# Altium PCB main-module-60mmPIC.PcbDoc (part 2 of 2)
Units mm, origin at the board's own origin, x right, y up, seen from the top; angles counter-clockwise.
Board outline 60 x 60 mm, 2 copper layers (Top Layer, Bottom Layer), stack 1.591 mm thick; 103 components, 103 nets, 469 pads, 239 vias.
Unrouted connection lines stored in the file: 40.
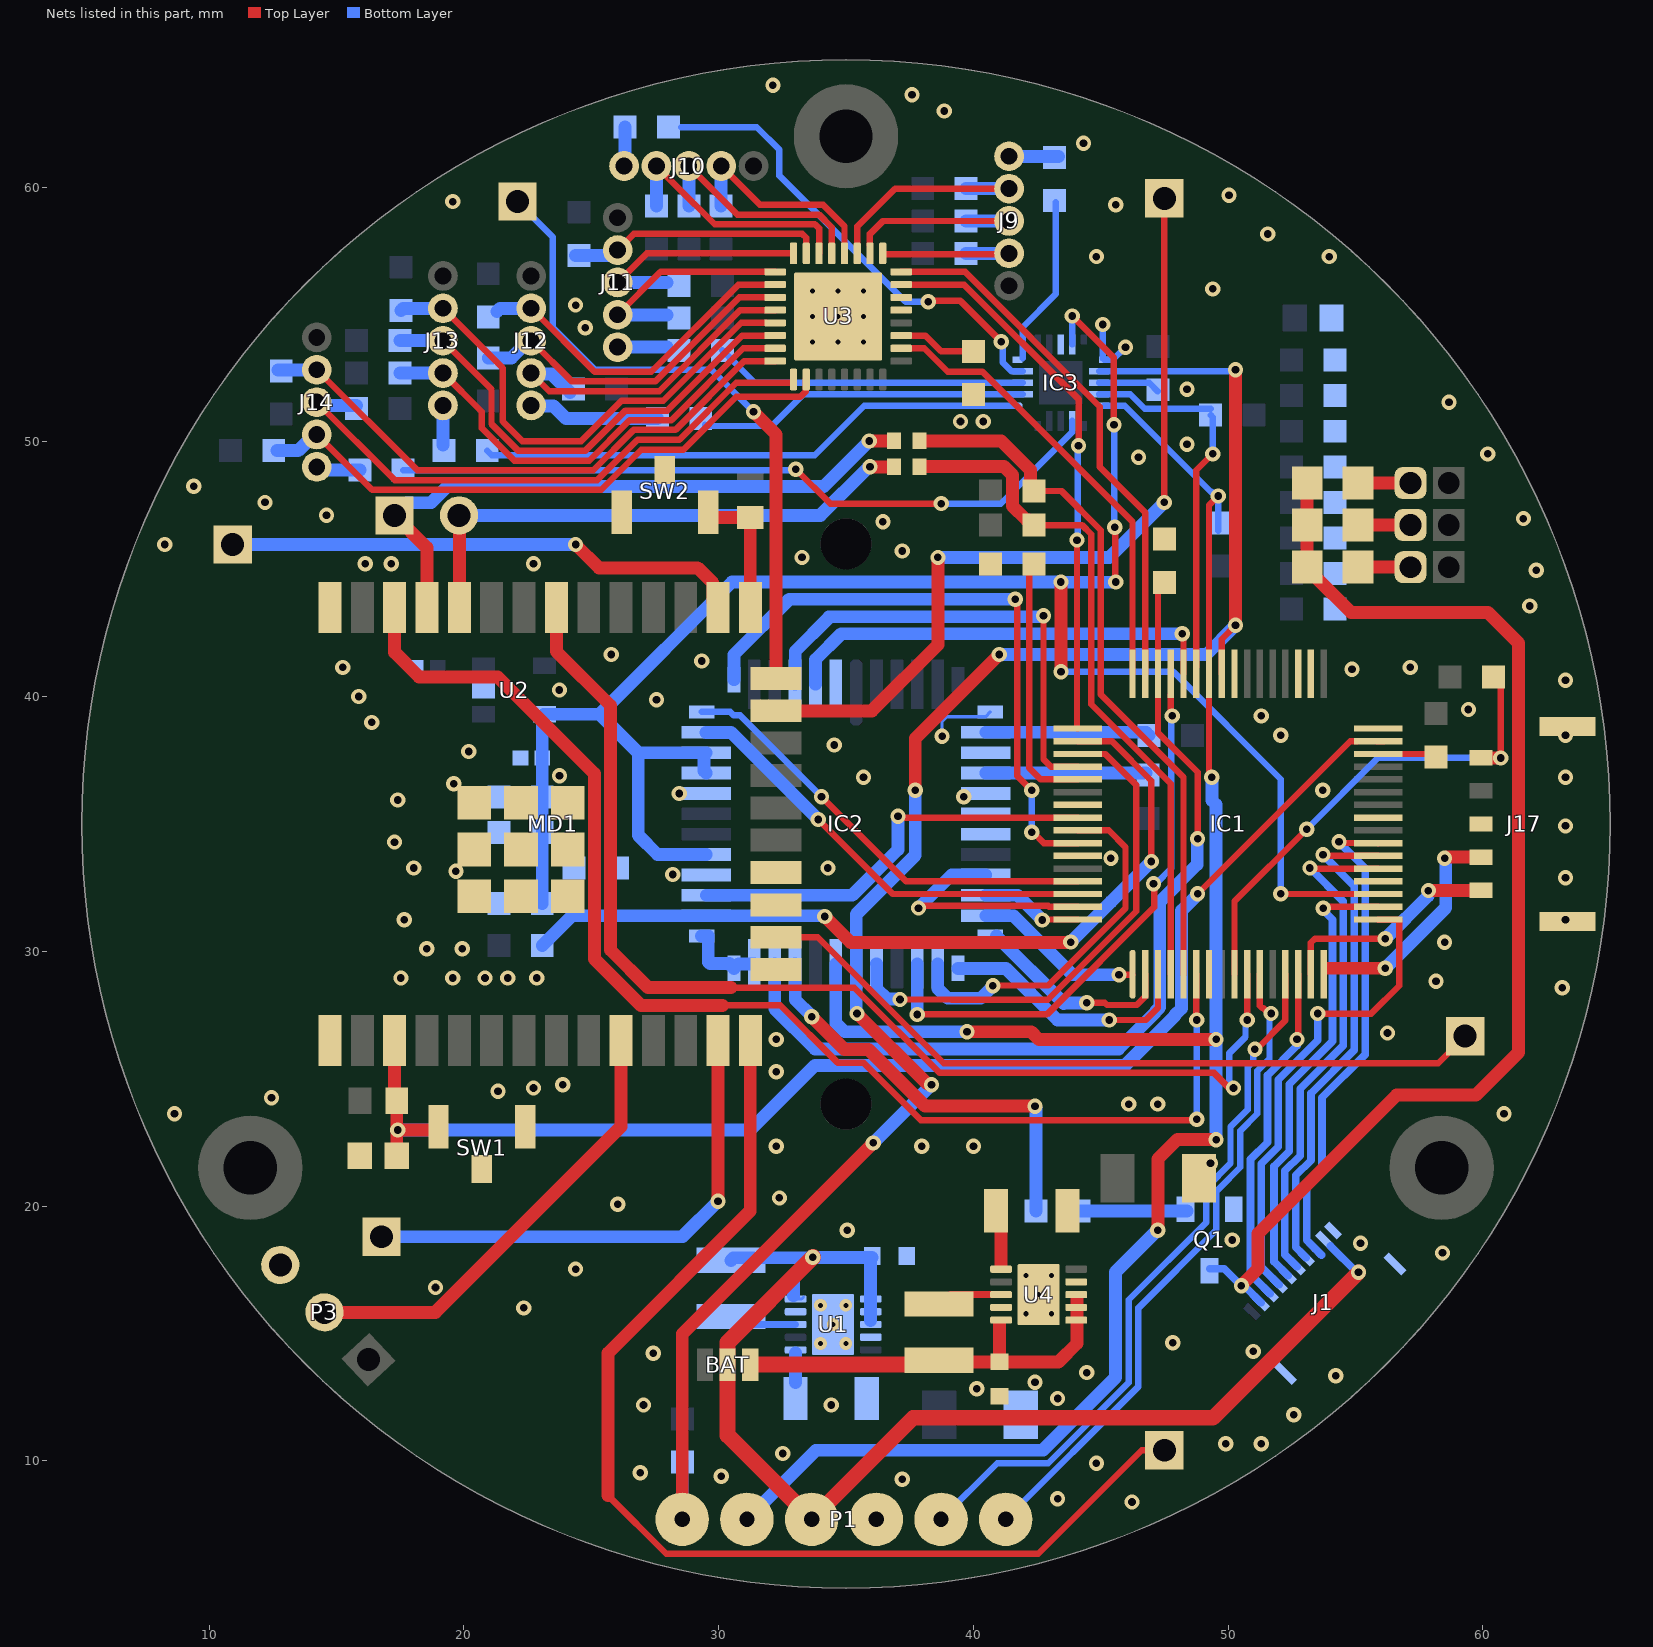
[diagram p2: the nets of this part, all layers, seen from the top]

## Via types
v1: diameter 0.6, hole 0.3, Top Layer to Bottom Layer, 220 vias
v2: diameter 0.5, hole 0.2, Top Layer to Bottom Layer, 19 vias

## Nets (pads, with @x,y where several pads share a name; then routed paths per layer and width w, separated by ;. In a path a pad name is that pad's centre, name@x,y a point inside that pad or via, vN(x,y) a via of type N, cw(c..) or ccw(c..) an arc to the next point about the centre after c; other vN are vias at no path point) (continued)
A3V3: C7.1 C14.2 C17.2 C18.2 C19.2 IC1.19 IC2.35 IC2.39 IC2.40 IC3.9 U2.5 | length 78.4
  Top Layer w0.25: v1@52.078,32.25 IC1.19@55.9,32.25
  Top Layer w0.254: v1(43.884,54.945) 45.519,53.31 v1(45.519,50.673) ; v1(45.556,46.646) 45.574,46.628 45.574,44.596 v1@45.593,44.577
  Top Layer w0.508: v1(43.438,40.976) v1@43.438,44.496
  Bottom Layer w0.25: IC3.9@43.884,53.824 v1(43.884,54.945)
  Bottom Layer w0.254: v1(43.438,40.976) 47.855,40.976 52.07,36.762 v1(52.07,32.258) ; v1(45.519,50.673) 45.538,50.655 45.538,46.664 v1(45.556,46.646)
  Bottom Layer w0.5: C17.2@23.075,31.877 23.075,33.274 C19.2@23.075,34.671 C14.2@23.075,36.068 23.075,37.592 23.075,39.238 23.146,39.309 U2.5@23.171,39.309 25.334,39.309 ; IC2.35@29.51,33.8 27.599,33.8 26.843,34.556 26.843,37.8 ; IC2.39@29.51,37 29.429,37.081 29.429,37.719 IC2.40@29.51,37.8 26.843,37.8 ; 41.963,44.496 41.959,44.5 30.525,44.5 25.334,39.309 ; 41.963,44.5 v1(43.438,44.5) ; v1@43.438,44.496 45.551,44.496 v1@45.575,44.521 ; 25.334,39.309 26.843,37.8
  other v1: 45.593,44.5
E32_RST: C1.2 IC1.31 MD1.3 R1.1 SW1.2 | length 52.3
  Top Layer w0.25: v1(48.804,32.258) 54.796,38.25 IC1.31@55.077,38.25
  Top Layer w0.254: IC1.31@55.839,38.25 IC1.31@56.121,38.25
  Top Layer w0.508: R1.1@17.28,24.13 MD1.3@17.28,26.5 ; C1.2@17.362,22.188 17.362,22.987 R1.1@17.362,24.13 ; v1(17.399,22.987) 18.794,22.987 SW1.2@18.831,22.95
  Bottom Layer w0.508: v1(17.399,22.987) 31.242,22.987 33.782,25.527 45.968,25.527 47.914,27.473 47.914,27.506 48.168,27.76 48.168,31.597 48.804,32.233 v1(48.804,32.258)
GND: C1.1 C2.1 C4.1 C5.2 C6.2 C7.2 C8.2 C9.1 C10.1 C11.1 C12.1 C13.1 C14.1 C15.1 C16.1 C17.1 C18.1 C19.1 C26.1 C40.1 C41.2 C42.2 IC1.7 IC1.20 IC1.25 IC1.34 IC1.35 IC1.40 IC1.55 IC1.59 IC2.7 IC2.9 IC2.11 IC2.12 IC2.13 IC2.29 IC2.30 IC2.31 IC2.34 IC2.38 IC2.48 IC3.8 IC3.11 J1.1 J1.MP1 J1.MP2 J17.3 J17.MP1 J17.MP2 MD1.1 MD1.15 MD1.38 MD1.39 MD1.39_1 MD1.39_2 MD1.39_3 MD1.39_4 MD1.39_5 MD1.39_6 MD1.39_7 MD1.39_8 P1.4 P3.3 Q1.2 R10.1 R16.1 R25.1 SW1.1 SW1.3 SW2.1 SW2.3 U1.4 U1.9 U1.11 U2.2 U3.29 U3.30 U3.33 U4.4 U4.9 U4.11 | length 8.6
  Top Layer w0.254: U3.33@35.421,56.122 35.609,56.122 U3.33@35.65,56.081
  Bottom Layer w0.127: v1(38.772,38.444) 38.772,39.026 38.96,39.214 40.478,39.214 IC2.7@40.665,39.4 ; IC3.11@45.085,53.273 IC3.11@45.134,53.224
  Bottom Layer w0.25: IC3.11@45.085,53.273 v1(45.085,54.61) ; IC3.11@45.134,53.224 45.477,53.224 v1(45.974,53.721)
  Bottom Layer w0.508: IC2.31@29.335,30.6 29.585,30.6 IC2.31@29.591,30.594 ; IC2.31@29.591,30.6 IC2.31@29.591,30.594 ; IC2.29@31.4,29.51 30.775,29.51 IC2.30@30.6,29.335 30.42,29.515 29.665,29.515 29.591,29.589 IC2.31@29.591,30.594
  other v1: 46.228,8.382 43.307,8.509 37.211,9.271 30.099,9.398 26.924,9.525 44.831,9.906 32.512,10.287 49.911,10.668 51.308,10.668 52.578,11.811 27.051,12.192 34.417,12.192 43.307,12.446 40.132,12.827 42.418,13.081 54.229,13.335 44.45,13.462 27.432,14.224 50.984,14.294 47.832,14.629 22.352,16.002 18.886,16.801 24.384,17.526 58.42,18.161 55.199,18.536 50.165,18.669 35.052,19.05 26.035,20.066 32.385,20.32 49.309,21.676 32.258,22.352 37.973,22.352 40.005,22.352 8.636,23.622 60.833,23.622 46.101,24.003 47.244,24.003 12.446,24.257 21.336,24.511 22.733,24.638 23.876,24.765 32.258,25.273 32.258,26.543 56.261,26.797 63.119,28.575 58.166,28.829 17.526,28.956 19.558,28.956 20.828,28.956 21.717,28.956 22.86,28.956 18.542,30.099 19.939,30.099 58.501,30.353 17.653,31.242 63.246,31.242 63.246,32.893 28.194,33.02 19.685,33.147 18.034,33.274 34.29,33.274 45.4,33.655 17.272,34.29 63.246,34.925 17.399,35.941 39.624,36.068 28.448,36.195 53.721,36.322 19.604,36.576 35.687,36.83 63.246,36.83 23.752,36.896 20.193,37.846 34.544,38.1 52.07,38.481 63.246,38.481 16.383,38.989 51.308,39.243 59.436,39.497 27.559,39.878 15.875,40.005 23.749,40.259 63.246,40.64 54.864,41.074 15.24,41.148 57.15,41.148 29.337,41.402 25.781,41.656 61.849,43.561 62.103,44.958 16.129,45.212 17.145,45.212 22.733,45.212 33.274,45.466 37.211,45.72 8.255,45.974 36.449,46.863 61.595,46.99 14.605,47.117 12.192,47.625 9.398,48.26 46.482,49.403 60.198,49.53 48.387,49.911 39.497,50.8 40.386,50.8 58.674,51.562 48.387,52.07 24.765,54.483 24.384,55.372 49.403,56.007 44.831,57.277 53.975,57.277 51.562,58.166 45.593,59.309 19.558,59.436 50.038,59.69 44.323,61.722 38.862,62.992 37.592,63.627 32.131,64.008
  other v2: 33.995,14.601 34.995,14.601 34.495,15.351 42.062,15.771 43.062,15.771 33.995,16.101 34.995,16.101 42.562,16.521 42.062,17.271 43.062,17.271 33.691,53.926 34.691,53.926 35.691,53.926 33.691,54.926 34.691,54.926 35.691,54.926 33.691,55.926 34.691,55.926 35.691,55.926
IMG_CLK: IC1.44 IC2.47 | length 17.4
  Top Layer w0.25: v1(48.201,42.469) 48.25,42.42 IC1.44@48.25,40.9
  Bottom Layer w0.5: IC2.47@33.8,40.49 33.8,41.361 33.804,41.365 33.804,41.458 34.815,42.469 v1(48.201,42.469)
IMG_EXPOSURE: IC1.51 IC2.23 | length 20.5
  Top Layer w0.25: v1@37.144,28.107 39.135,28.107 39.141,28.102 42.925,28.102 46.355,31.532 46.401,31.578 46.401,36.53 45.181,37.75 IC1.51@44.1,37.75
  Bottom Layer w0.5: IC2.23@36.2,29.51 36.204,29.506 36.204,28.542 36.621,28.125 37.101,28.125 v1(37.119,28.107)
IO0: MD1.25 R2.1 SW2.2 | length 4.7
  Top Layer w0.508: 29.999,47.027 R2.1@31.242,47.027 ; MD1.25@31.242,43.432 R2.1@31.242,46.938
LED1_BLUE: C22.1 J9.2 U3.3 | length 9.1
  Top Layer w0.254: U3.3@35.441,57.401 35.441,58.459 36.926,59.944 J9.2@41.148,59.944
  Bottom Layer w0.508: C22.1@39.712,59.944 J9.2@41.402,59.944
LED1_GREEN: C21.1 J9.3 U3.2 | length 7.6
  Top Layer w0.254: U3.2@35.941,57.715 35.941,58.166 36.449,58.674 J9.3@41.148,58.674
  Bottom Layer w0.508: C21.1@39.712,58.674 J9.3@41.402,58.674
LED1_RED: C20.1 J9.4 U3.1 | length 6.4
  Top Layer w0.254: U3.1@36.441,57.401 36.441,57.385 36.454,57.372 41.116,57.372 J9.4@41.148,57.404
  Bottom Layer w0.508: C20.1@39.712,57.404 J9.4@41.402,57.404
LED2_BLUE: C25.1 J10.2 U3.6 | length 9.9
  Top Layer w0.254: J10.2@27.559,60.833 28.341,60.051 29.845,58.547 33.782,58.547 33.941,58.388 U3.6@33.941,57.401
  Bottom Layer w0.508: C25.1@27.559,59.27 J10.2@27.559,60.833
LED2_GREEN: C24.1 J10.3 U3.5 | length 9.2
  Top Layer w0.254: J10.3@28.829,60.833 30.734,58.928 33.94,58.928 34.441,58.427 U3.5@34.441,57.401
  Bottom Layer w0.508: C24.1@28.829,59.27 J10.3@28.829,60.833
LED2_RED: C23.1 J10.4 U3.4 | length 8.5
  Top Layer w0.254: J10.4@30.099,60.833 31.623,59.309 34.098,59.309 34.941,58.466 U3.4@34.941,57.401
  Bottom Layer w0.508: C23.1@30.099,59.27 J10.4@30.099,60.833
LED3_BLUE: C29.1 J11.2 U3.9 | length 8.9
  Top Layer w0.254: J11.2@26.035,54.991 27.72,56.676 U3.9@32.216,56.676 32.229,56.689 U3.9@32.216,56.689
  Bottom Layer w0.508: J11.2@26.035,54.991 27.979,54.991
LED3_GREEN: C28.1 J11.3 U3.8 | length 9.3
  Top Layer w0.254: J11.3@26.035,56.261 27.175,57.401 U3.8@32.941,57.401
  Bottom Layer w0.508: J11.3@26.035,56.261 27.979,56.261
LED3_RED: C27.1 J11.4 U3.7 | length 10.2
  Top Layer w0.254: J11.4@26.035,57.531 26.67,58.166 33.288,58.166 33.441,58.013 U3.7@33.441,57.245
  Bottom Layer w0.508: C27.1@24.384,57.316 25.641,57.316 25.856,57.531 J11.4@26.035,57.531
LED4_BLUE: C32.1 J12.2 U3.12 | length 13
  Top Layer w0.254: J12.2@22.639,52.705 23.35,51.994 27.671,51.994 30.854,55.176 U3.12@32.216,55.176
  Bottom Layer w0.508: J12.2@22.639,52.705 22.681,52.663 23.449,52.663 C32.1@24.169,51.943
LED4_GREEN: C31.1 J12.3 U3.11 | length 13.6
  Top Layer w0.254: J12.3@22.639,53.975 24.239,52.375 27.514,52.375 30.815,55.676 U3.11@32.216,55.676
  Bottom Layer w0.508: C31.1@20.956,53.3 21.869,53.3 22.544,53.975 J12.3@22.639,53.975
LED4_RED: C30.1 J12.4 U3.10 | length 13.4
  Top Layer w0.254: J12.4@22.639,55.245 25.128,52.756 27.356,52.756 30.776,56.176 U3.10@32.216,56.176
  Bottom Layer w0.508: C30.1@21.297,55.118 21.424,55.245 J12.4@22.639,55.245
LED5_BLUE: C35.1 J13.2 U3.15 | length 18.4
  Top Layer w0.254: J13.2@19.177,52.705 20.701,51.181 20.701,50.546 21.983,49.264 24.915,49.264 26.501,50.851 28.145,50.851 30.97,53.676 U3.15@32.216,53.676
  Bottom Layer w0.508: C35.1@17.487,52.705 J13.2@19.177,52.705
LED5_GREEN: C34.1 J13.3 U3.14 | length 19.2
  Top Layer w0.254: J13.3@19.177,53.975 21.082,52.07 21.082,50.704 22.141,49.645 24.757,49.645 26.344,51.232 27.987,51.232 30.931,54.176 U3.14@32.216,54.176
  Bottom Layer w0.508: C34.1@17.487,53.975 J13.3@19.177,53.975
LED5_RED: C33.1 J13.4 U3.13 | length 19.7
  Top Layer w0.254: J13.4@19.177,55.245 21.521,52.901 21.521,50.804 22.299,50.026 24.599,50.026 26.186,51.613 27.829,51.613 30.892,54.676 U3.13@31.877,54.676
  Bottom Layer w0.508: C33.1@17.526,55.157 17.614,55.245 J13.4@19.177,55.245
LED6_BLUE: C38.1 J14.2 U3.18 | length 24
  Top Layer w0.254: J14.2@14.224,50.292 16.395,48.121 25.388,48.121 26.964,49.697 27.385,49.697 27.386,49.698 28.616,49.698 30.69,51.772 33.213,51.772 33.428,51.987 33.428,52.438 U3.18@33.441,52.451
  Bottom Layer w0.508: C38.1@12.661,49.657 13.494,49.657 14.129,50.292 J14.2@14.224,50.292
LED6_GREEN: C37.1 J14.3 U3.17 | length 23.1
  Top Layer w0.254: J14.3@14.224,51.562 17.284,48.502 25.23,48.502 26.817,50.089 28.461,50.089 30.696,52.324 U3.17@32.819,52.324
  Bottom Layer w0.508: J14.3@14.224,51.562 14.35,51.436 14.817,51.436 ; 14.818,51.435 15.406,51.435 C37.1@15.787,51.435
LED6_RED: C36.1 J14.4 U3.16 | length 22.9
  Top Layer w0.254: J14.4@14.224,52.832 18.173,48.883 25.072,48.883 26.659,50.47 28.303,50.47 31.009,53.176 U3.16@32.216,53.176 U3.16@32.229,53.163
  Bottom Layer w0.508: C36.1@12.7,52.832 J14.4@14.224,52.832
LED_SCLK: IC1.49 U3.31 | length 21.8
  Top Layer w0.25: v1@44.069,46.123 44.069,38.75 IC1.49@44.1,38.75
  Top Layer w0.254: U3.31@37.166,56.176 39.636,56.176 44.129,51.683 v1(44.129,49.851)
  Bottom Layer w0.254: v1(44.069,46.147) 44.099,46.177 44.099,49.821 v1(44.129,49.851)
LED_SIN: IC1.47 U3.32 | length 21.2
  Top Layer w0.25: U3.32@37.166,56.676 39.675,56.676 44.965,51.385 44.965,49.015 46.75,47.23 IC1.47@46.75,40.9
LED_XLAT: IC1.48 U3.26 | length 17.9
  Top Layer w0.25: U3.26@37.166,53.676 38.071,53.676 38.989,52.758 40.361,52.758 46.25,46.869 IC1.48@46.25,40.9
M\C\L\R\: IC1.9 J17.5 R9.1 | length 19.5
  Top Layer w0.127: J17.5@59.926,37.6 J17.5@59.934,37.592
  Top Layer w0.25: IC1.9@50.25,29.1 50.25,31.962 v1(53.086,34.798)
  Top Layer w0.254: v1(60.706,37.592) R9.1@60.706,40.657
  Top Layer w0.508: J17.5@59.934,37.592 v1(60.706,37.592)
  Bottom Layer w0.254: v1(53.086,34.798) 55.88,37.592 v1(60.706,37.592)
NetC5_1: BAT.2 C5.1 J1.2 L1.1 P1.3 U1.5 U1.6 U1.7 U1.8 | length 50.3
  Top Layer w0.6: P1.3@33.65,7.7 33.8,7.85 37.634,11.684 49.403,11.684 v1(55.118,17.399)
  Top Layer w0.635: P1.3@33.65,7.7 30.353,10.997 BAT.2@30.353,13.774 30.353,14.642 v1(33.7,17.989)
  Bottom Layer w0.127: U1.5@33.02,16.351 33.255,16.351 U1.5@33.331,16.427 ; v1@33.682,17.971 v1(33.7,17.989)
  Bottom Layer w0.3: 54.021,18.43 55.053,17.399 v1(55.118,17.399)
  Bottom Layer w0.508: L1.1@30.48,17.864 30.587,17.971 33.682,17.971 32.943,17.232 U1.5@32.943,16.48 ; v1(33.7,17.989) 36.028,17.989 35.97,17.931 U1.6@35.97,16.351 U1.7@35.97,15.851 35.97,15.5
NetC6_1: C6.1 U1.1 | length 1.1
  Bottom Layer w0.508: C6.1@33.02,13.078 U1.1@33.02,14.224
NetC41_1: BAT.3 C41.1 L2.1 U4.5 U4.6 U4.7 U4.8 | length 16.5
  Top Layer w0.127: L2.1@38.65,13.955 39.044,13.955 L2.1@39.116,13.883
  Top Layer w0.254: U4.8@44.037,16.521 U4.8@44.04,16.524
  Top Layer w0.508: L2.1@39.116,13.883 C41.1@40.981,13.883 ; U4.5@41.021,15.4 C41.1@41.021,13.883 43.347,13.883 44.069,14.605 44.069,16.021 44.069,16.356
  Top Layer w0.635: BAT.3@31.242,13.774 38.555,13.774 L2.1@38.693,13.912
NetC42_1: C42.1 U4.1 | length 1.9
  Top Layer w0.508: 41.087,17.7 C42.1@41.087,19.558
NetIC1_4: IC1.4 J15.2 R29.1 | length 27.1
  Top Layer w0.25: R29.1@42.379,46.736 44.263,46.736 44.623,46.376 44.623,39.705 47.75,36.578 IC1.4@47.75,29.1
  Top Layer w0.508: J15.2@37.931,49.027 41.208,49.027 41.529,48.706 41.529,47.486 42.083,46.932 42.183,46.932 R29.1@42.379,46.736
NetIC1_5: IC1.5 J16.2 R30.1 | length 27.7
  Top Layer w0.25: R30.1@42.379,48.075 43.463,48.075 45.004,46.534 45.004,40.086 48.25,36.84 IC1.5@48.25,29.1
  Top Layer w0.508: J16.2@37.888,50.038 41.095,50.038 42.235,48.898 R30.1@42.235,48.075
NetIC1_6: IC1.6 MD1.36 | length 50.8
  Top Layer w0.25: IC1.6@48.75,29.1 48.752,29.098 48.752,27.321 v1(48.768,27.305)
  Top Layer w0.254: 30.149,27.881 32.423,27.881 34.67,25.633 35.677,25.633 37.943,23.368 48.722,23.368 v1(48.768,23.414)
  Top Layer w0.508: MD1.36@17.28,43.5 17.28,41.738 18.244,40.774 21.329,40.774 25.121,36.982 25.121,29.707 26.947,27.881 30.149,27.881
  Bottom Layer w0.254: v1(48.768,23.414) v1(48.768,27.305)
NetIC1_10: IC1.10 MD1.31 | length 46
  Top Layer w0.25: v1@50.673,27.305 50.673,27.399 50.75,27.476 IC1.10@50.75,29.1
  Top Layer w0.254: 30.48,28.575 35.327,28.575 38.675,25.227 49.449,25.227 50.038,24.638 v1(50.211,24.638)
  Top Layer w0.508: MD1.31@23.63,43.5 23.63,41.775 25.756,39.649 25.756,30.054 27.235,28.575 30.48,28.575
  Bottom Layer w0.254: v1(50.211,24.638) 50.038,24.638 50.038,25.991 50.684,26.637 50.684,27.239 v1(50.75,27.305)
NetIC1_11: IC1.11 P1.6 | length 26
  Top Layer w0.25: IC1.11@51.25,29.1 51.25,27.867 51.342,27.775 51.378,27.775 51.594,27.559 v1(51.689,27.559)
  Bottom Layer w0.254: P1.6@41.27,7.7 46.482,12.912 46.482,16.002 49.53,19.05 49.53,20.574 49.649,20.693 50.477,21.521 50.477,22.951 51.146,23.62 51.146,25.303 51.627,25.784 51.627,27.497 v1(51.689,27.559)
NetIC1_13: IC1.13 P1.5 | length 28.2
  Top Layer w0.25: v1(51.054,26.162) 51.124,26.162 52.25,27.288 IC1.13@52.25,29.1
  Bottom Layer w0.254: P1.5@38.73,7.7 40.936,9.906 42.937,9.906 46.101,13.07 46.101,16.317 49.149,19.365 49.149,20.732 50.096,21.679 50.096,23.109 50.765,23.778 50.765,25.461 50.988,25.684 50.988,26.096 v1(51.054,26.162)
NetIC1_14: IC1.14 J1.8 | length 13.6
  Top Layer w0.254: v1(52.705,26.543) 52.748,26.586 52.748,29.098 IC1.14@52.75,29.1
  Bottom Layer w0.3: J1.8@51.646,16.563 50.881,17.328 50.881,21.843 51.55,22.512 51.55,25.136 52.705,26.291 v1(52.705,26.543)
NetIC1_17: IC1.17 J1.7 | length 18.9
  Top Layer w0.254: v1(53.525,27.559) 55.626,27.559 56.721,28.654 56.721,31.248 56.719,31.25 IC1.17@55.9,31.25
  Bottom Layer w0.3: J1.7@52,16.917 51.308,17.608 51.308,21.666 51.977,22.335 51.977,24.959 53.525,26.507 v1(53.525,27.559)
NetIC1_18: IC1.18 J1.6 | length 17.9
  Top Layer w0.25: v1(53.733,31.696) 53.785,31.748 IC1.18@55.898,31.748
  Top Layer w0.254: IC1.18@55.898,31.748 IC1.18@55.9,31.75
  Bottom Layer w0.3: J1.6@52.353,17.27 51.805,17.818 51.805,21.559 52.404,22.158 52.404,24.782 54.102,26.48 54.102,31.246 53.733,31.615 v1(53.733,31.696)
NetIC1_21: IC1.21 J1.5 | length 20
  Top Layer w0.254: v1(53.213,33.274) 53.253,33.234 55.884,33.234 IC1.21@55.894,33.244
  Bottom Layer w0.3: J1.5@52.707,17.624 52.232,18.099 52.232,21.383 52.831,21.982 52.831,24.606 54.529,26.304 54.529,31.958 v1(53.213,33.274)
NetIC1_22: IC1.22 J1.4 | length 19.6
  Top Layer w0.25: v1(53.727,33.788) 53.765,33.75 IC1.22@55.9,33.75
  Bottom Layer w0.3: J1.4@53.06,17.977 52.659,18.379 52.659,21.206 53.258,21.805 53.258,24.429 54.956,26.127 54.956,32.559 v1(53.727,33.788)
NetIC1_23: IC1.23 J1.3 | length 19.4
  Top Layer w0.25: v1(54.356,34.304) 54.408,34.252 55.898,34.252 IC1.23@55.9,34.25
  Bottom Layer w0.3: 53.668,18.077 J1.3@53.414,18.331 53.086,18.659 53.086,20.851 53.685,21.45 53.685,24.252 55.383,25.95 55.383,33.263 54.356,34.29 v1(54.356,34.304)
NetIC1_30: IC1.30 R11.1 | length 2.3
  Top Layer w0.25: IC1.30@55.9,37.75 58.047,37.75 R11.1@58.166,37.631
NetIC1_32: IC1.32
NetIC1_45: IC1.45 IC2.21 | length 21.8
  Top Layer w0.25: IC1.45@47.752,40.077 47.752,39.295 v1(47.804,39.243)
  Top Layer w0.254: v1(37.8,27.523) 39.753,27.523 42.89,27.523 47.106,31.739 47.106,32.623 v1(47.073,32.656)
  Bottom Layer w0.254: v1(47.073,32.656) 47.166,32.656 47.773,33.263 47.773,39.212 v1(47.804,39.243)
  Bottom Layer w0.5: v1(37.8,27.523) IC2.21@37.8,29.51
NetIC1_46: IC1.46 IC2.28 R16.2 | length 36.3
  Top Layer w0.25: R16.2@47.498,44.489 47.25,44.241 IC1.46@47.25,40.9 47.25,38.581 48.804,37.027 v1(48.804,34.417)
  Bottom Layer w0.5: IC2.28@32.2,29.51 32.2,27.744 33.782,26.162 45.705,26.162 47.141,27.598 47.141,27.631 47.318,27.808 47.318,31.944 48.786,33.412 48.786,34.399 v1(48.804,34.417)
NetIC1_50: IC1.50 IC2.32 R14.1 | length 32.8
  Top Layer w0.25: IC1.50@44.1,38.25 45.443,38.25 46.99,36.703 v1(46.99,33.528)
  Top Layer w0.508: v1(34.163,31.369) 35.179,30.353 43.815,30.353 v1(43.826,30.364)
  Bottom Layer w0.5: R14.1@23.075,30.226 24.249,31.4 IC2.32@29.51,31.4 34.107,31.4 34.121,31.387 v1@34.133,31.399
  Bottom Layer w0.508: v1(43.826,30.364) 45.406,31.944 45.406,31.952 46.981,33.528 v1(46.99,33.528)
NetIC1_53: IC1.53 R10.2 | length 10.3
  Top Layer w0.25: R10.2@42.379,45.339 42.199,45.159 42.199,37.197 42.646,36.75 IC1.53@44.1,36.75
NetIC1_56: IC1.56 IC2.33 | length 16.7
  Top Layer w0.25: v1(37.042,35.306) 37.098,35.25 IC1.56@44.1,35.25
  Bottom Layer w0.5: IC2.33@29.51,32.2 35.248,32.2 37.042,33.994 v1(37.042,35.306)
NetIC1_57: IC1.57 IC2.20 | length 14.5
  Top Layer w0.25: v1(40.767,28.654) 40.774,28.661 42.946,28.661 45.974,31.69 45.974,34.093 45.317,34.75 IC1.57@44.1,34.75
  Bottom Layer w0.5: IC2.20@38.6,29.51 38.604,29.506 38.604,28.542 38.992,28.154 40.284,28.154 40.767,28.637 v1(40.767,28.654)
NetIC2_8: IC2.8 R12.1 | length 6.5
  Bottom Layer w0.5: IC2.8@40.49,38.6 46.783,38.6 R12.1@46.902,38.481
NetIC2_10: IC2.10 R13.1 | length 6.3
  Bottom Layer w0.5: IC2.10@40.49,37 R13.1@46.781,37
NetIC2_27: IC2.27 R15.1 | length 16.7
  Top Layer w0.508: v1(33.655,27.432) 34.946,26.141 35.888,26.141 38.107,23.922 v1(42.418,23.922)
  Bottom Layer w0.5: IC2.27@33,29.51 33.004,29.506 33.004,28.108 33.655,27.457 v1(33.655,27.432)
  Bottom Layer w0.508: v1(42.418,23.922) 42.418,23.897 42.457,23.858 R15.1@42.457,19.812
NetIC3_1: IC3.1 R23.2 | length 21.7
  Bottom Layer w0.25: R23.2@20.916,49.657 21.092,49.481 33.78,49.481 35.719,51.42 IC3.1@41.73,51.42
NetIC3_2: IC3.2 R22.2 | length 13
  Bottom Layer w0.25: R22.2@29.51,50.627 32.085,50.627 33.332,51.874 IC3.2@41.934,51.874
  Bottom Layer w0.254: R22.2@29.464,50.673 R22.2@29.51,50.627
NetIC3_3: IC3.3 R21.2 | length 12.3
  Bottom Layer w0.25: 31.419,52.324 IC3.3@41.934,52.324
  Bottom Layer w0.254: R21.2@30.149,53.594 31.419,52.324
NetIC3_4: IC3.4 R20.2 | length 18.4
  Top Layer w0.254: v1(38.227,55.499) 38.264,55.536 39.492,55.536 v1(41.101,53.928)
  Bottom Layer w0.25: v1(41.101,53.928) 41.154,53.874 41.154,53.12 41.5,52.774 IC3.4@41.934,52.774
  Bottom Layer w0.254: 28.536,62.357 31.496,62.357 32.385,61.468 32.385,60.454 37.34,55.499 v1(38.227,55.499)
NetIC3_5: IC3.5 R17.2 | length 6.7
  Bottom Layer w0.254: 41.934,53.278 41.934,54.507 43.243,55.816 R17.2@43.243,59.412
NetIC3_17: IC3.17 R24.2 | length 28.4
  Top Layer w0.254: v1(33.03,48.929) 34.38,47.579 v1(38.735,47.579)
  Bottom Layer w0.25: v1(38.735,47.579) 41.073,47.579 43.882,50.388
  Bottom Layer w0.254: R24.2@17.614,48.895 32.996,48.895 v1(33.03,48.929) ; 43.882,50.388 43.882,50.822 IC3.17@43.884,50.824
NetJ1_9: J1.9 Q1.3 R26.1 R27.1 R28.1 | length 47.2
  Top Layer w0.508: v1(50.524,16.869) 50.524,16.894 51.181,17.551 51.181,18.923 56.613,24.355 59.729,24.355 61.41,26.036 61.41,42.098 60.197,43.311 54.826,43.311 53.448,44.689 53.376,44.761 53.156,44.761 53.156,45.428 53.102,45.481 53.102,46.625 53.213,46.736 53.102,46.847 53.102,48.205 R26.1@53.213,48.316
  Bottom Layer w0.3: Q1.3@49.276,17.539 49.854,17.539 v1(50.524,16.869) ; v1@50.546,16.891 50.611,16.891 J1.9@51.293,16.209
NetJ2_1: J2.1 MD1.24 | length 25.6
  Top Layer w0.508: v1(31.369,51.181) 32.258,50.292 32.258,42.519 32.25,42.511 MD1.24@32.25,40.715
  Bottom Layer w0.254: J2.1@22.098,59.436 23.495,58.039 23.495,54.483 25.146,52.832 29.718,52.832 30.555,51.995 v1(31.369,51.181)
NetJ4_1: J4.1 MD1.26 | length 20.5
  Top Layer w0.508: v1(24.384,45.974) 25.302,45.056 29.176,45.056 29.784,44.447 29.784,43.886 29.784,43.696 MD1.26@29.98,43.5
  Bottom Layer w0.508: J4.1@10.922,45.974 14.097,45.974 14.758,45.974 v1(24.384,45.974)
NetJ5_1: J5.1 MD1.14 | length 45.3
  Top Layer w0.254: 25.654,8.636 27.94,6.35 42.545,6.35 46.609,10.414 J5.1@47.498,10.414 47.752,10.668 J5.1@48.006,10.668
  Top Layer w0.508: 25.654,8.636 25.654,14.224 31.242,19.812 MD1.14@31.242,26.492
NetJ6_1: J6.1 MD1.16 | length 29.7
  Top Layer w0.254: MD1.16@32.079,30.555 33.888,30.555 38.835,25.608 50.825,25.608 58.247,25.608 J6.1@59.309,26.67
NetJ7_1: J7.1 MD1.13 | length 20.2
  Top Layer w0.254: v1@29.972,20.099 v1(29.972,20.193) v1@29.98,20.201
  Top Layer w0.508: v1@29.98,20.201 MD1.13@29.98,26.5
  Bottom Layer w0.508: J7.1@16.764,18.796 28.575,18.796 v1(29.972,20.193)
NetJ8_1: J8.1 MD1.23 | length 32.6
  Top Layer w0.254: v1(47.498,47.625) J8.1@47.498,59.563
  Top Layer w0.508: MD1.23@32.25,39.445 36.016,39.445 38.608,42.037 v1(38.608,45.466)
  Bottom Layer w0.508: v1(38.608,45.466) 45.339,45.466 v1(47.498,47.625)
NetL1_2: L1.2 U1.3 | length 1.9
  Bottom Layer w0.28: L1.2@31.167,15.537 31.353,15.351 U1.3@33.02,15.351
NetL2_2: L2.2 U4.3 | length 2.5
  Top Layer w0.254: L2.2@38.735,16.154 L2.2@39.102,16.521
  Top Layer w0.28: L2.2@39.102,16.521 U4.3@41.087,16.521
NetLED1_K: LED1.2 R26.2 | length 2.1
  Top Layer w0.508: R26.2@55.102,48.387 LED1.2@57.162,48.387
NetLED2_K: LED2.2 R27.2 | length 2.1
  Top Layer w0.508: R27.2@55.102,46.736 LED2.2@57.162,46.736
NetLED3_K: LED3.2 R28.2 | length 2.1
  Top Layer w0.508: R28.2@55.102,45.085 LED3.2@57.162,45.085
NetMD1_10: MD1.10 P3.2 | length 18.5
  Top Layer w0.508: P3.2@14.524,15.828 18.876,15.828 26.162,23.114 MD1.10@26.162,26.952
NetMD1_17: MD1.17
NetMD1_18: MD1.18
NetQ1_G: Q1.1 R15.2 | length 4.2
  Bottom Layer w0.508: R15.2@44.157,19.812 Q1.1@48.387,19.812
NetR25_2: R25.2 U3.27 | length 3.1
  Top Layer w0.254: U3.27@37.166,54.176 38.11,54.176 38.731,53.555 R25.2@40.005,53.555
PGEC: IC1.15 J17.1 | length 8.9
  Top Layer w0.25: IC1.15@53.25,29.1 53.25,30.331 53.411,30.492 v1(56.167,30.492)
  Top Layer w0.508: v1(57.866,32.385) 57.874,32.393 59.73,32.393 59.737,32.4 J17.1@59.926,32.4
  Bottom Layer w0.508: v1(56.167,30.492) 57.848,32.173 57.848,32.367 v1(57.866,32.385)
PGED: IC1.16 J17.2 | length 9
  Top Layer w0.508: 53.9,29.337 v1(56.167,29.337) ; v1(58.501,33.655) 58.526,33.655 58.571,33.7 J17.2@59.926,33.7
  Bottom Layer w0.508: v1(56.167,29.337) 58.547,31.717 58.547,33.584 58.501,33.63 v1(58.501,33.655)
PIXEL_D0: IC1.58 IC2.43 | length 24.3
  Top Layer w0.25: v1(41.645,43.823) 41.645,43.728 41.73,43.644 41.73,36.883 v1@42.282,36.331
  Top Layer w0.254: v1(42.291,34.671) 42.348,34.671 42.769,34.25 IC1.58@44.1,34.25
  Bottom Layer w0.254: v1(42.291,34.671) v1(42.291,36.322)
  Bottom Layer w0.5: IC2.43@30.6,40.665 30.6,41.649 32.774,43.823 v1(41.645,43.823)
PIXEL_D1: IC1.61 IC2.42 | length 17.5
  Top Layer w0.25: v1(34.036,36.068) 37.354,32.75 IC1.61@44.1,32.75
  Bottom Layer w0.254: IC2.42@29.335,39.4 30.456,39.4 30.595,39.261 30.843,39.261 v1(34.036,36.068)
PIXEL_D2: IC1.62 IC2.41 | length 17.2
  Top Layer w0.25: v1(33.909,35.179) 36.838,32.25 IC1.62@44.1,32.25
  Bottom Layer w0.508: IC2.41@29.51,38.6 29.514,38.596 30.492,38.596 v1(33.909,35.179)
PIXEL_D3: IC1.63 IC2.15 | length 9.5
  Top Layer w0.25: v1(37.846,31.698) 37.941,31.698 38.026,31.783 42.936,31.783 42.969,31.75 IC1.63@44.1,31.75
  Bottom Layer w0.5: v1(37.846,31.698) 39.148,33 IC2.15@40.49,33
PIXEL_D4: IC1.64 IC2.16 | length 4
  Top Layer w0.25: v1(42.707,31.231) 42.726,31.25 IC1.64@44.1,31.25
  Bottom Layer w0.5: IC2.16@40.49,32.2 41.739,32.2 v1(42.707,31.231)
PIXEL_D5: IC1.1 IC2.17 | length 6.7
  Top Layer w0.254: v1(45.72,29.083) IC1.1@46.233,29.083
  Bottom Layer w0.5: IC2.17@40.49,31.4 41.581,31.4 43.898,29.083 v1(45.72,29.083)
PIXEL_D6: IC1.2 IC2.18 | length 8
  Top Layer w0.25: v1(44.45,27.986) 45.16,27.986 45.25,27.896 46.418,27.896 46.75,28.228 IC1.2@46.75,29.1
  Bottom Layer w0.508: IC2.18@40.911,30.596 43.549,27.958 43.56,27.968 44.432,27.968 v1(44.45,27.986)
PIXEL_D7: IC1.3 IC2.19 | length 10.2
  Top Layer w0.25: v1(45.339,27.305) 46.767,27.305 47.25,27.788 IC1.3@47.25,29.1
  Bottom Layer w0.508: IC2.19@39.4,29.335 41.274,29.335 43.304,27.305 v1(45.339,27.305)
PIXEL_WR: IC1.52 IC2.46 | length 18.7
  Top Layer w0.25: v1(42.753,43.18) 42.753,37.544 43.047,37.25 IC1.52@44.1,37.25
  Bottom Layer w0.5: IC2.46@33,40.49 33.004,40.494 33.004,41.776 34.325,43.097 ; 34.325,43.14 v1@42.753,43.13 ; v1@42.726,43.18 v1(42.753,43.18)
SCL: IC1.42 IC2.25 IC3.15 P1.2 R7.1 | length 79.1
  Top Layer w0.25: v1(49.356,36.83) 49.356,36.925 49.25,37.031 49.25,47.518 v1(49.611,47.879)
  Top Layer w0.508: v1(39.752,26.843) 42.271,26.843 42.571,26.543 v1(49.53,26.543) ; v1(47.244,19.05) 47.244,21.844 48.01,22.61 49.526,22.61 v1(49.53,22.606)
  Bottom Layer w0.25: IC3.15@45.134,51.424 45.946,51.424 49.323,48.047
  Bottom Layer w0.254: 49.323,48.047 49.35,48.047 49.551,47.845 49.551,47.819 v1@49.653,47.717 ; R7.1@49.611,46.522 49.611,47.717 v1(49.611,47.879)
  Bottom Layer w0.5: IC2.25@34.6,29.51 34.6,28.148 34.6,27.19 34.947,26.843 37.458,26.843 ; 37.458,26.842 v1(39.752,26.843)
  Bottom Layer w0.508: P1.2@31.11,7.7 33.824,10.414 42.727,10.414 45.576,13.263 45.576,17.407 47.219,19.05 v1(47.244,19.05) ; v1(49.356,36.83) 49.374,36.812 49.374,35.924 49.53,35.768 v1@49.53,26.568 ; v1(49.53,22.606) v1@49.53,26.518
SDA: IC1.41 IC2.24 IC3.12 P1.1 R8.1 | length 71.1
  Top Layer w0.25: IC1.41@49.75,40.9 49.75,42.257 v1(50.292,42.799)
  Top Layer w0.508: P1.1@28.57,7.752 28.57,14.981 v1(36.068,22.479) ; v1(35.433,27.559) 38.209,24.783 38.336,24.783 v1(38.354,24.765) ; v1(37.719,36.322) 37.719,37.776 37.719,38.354 v1(41.021,41.656) ; v1(50.292,42.799) v1(50.292,52.832)
  Bottom Layer w0.25: IC3.12@44.936,52.776 v1@50.236,52.776
  Bottom Layer w0.254: IC3.12@44.934,52.774 IC3.12@44.936,52.776 ; v1@50.236,52.776 v1(50.292,52.832)
  Bottom Layer w0.5: v1(35.433,27.559) 35.433,27.584 35.4,27.617 IC2.24@35.4,29.51 35.4,31.454 37.719,33.773 37.719,35.586 v1(37.719,36.322)
  Bottom Layer w0.508: P1.1@28.57,7.7 R8.1@28.57,9.94 ; v1(36.068,22.479) v1(38.354,24.765) ; v1(41.021,41.656) 41.022,41.657 49.15,41.657 v1(50.292,42.799)
T1: J9.1 R17.1 | length 2.2
  Bottom Layer w0.508: J9.1@41.148,61.214 R17.1@43.346,61.214
T2: J10.1 R20.1 | length 1.5
  Top Layer w0.508: J10.1@26.289,60.833 J10.1@26.328,60.872
  Bottom Layer w0.508: J10.1@26.328,60.872 R20.1@26.328,62.357
T3: J11.1 R21.1 | length 1.9
  Bottom Layer w0.508: J11.1@26.035,53.721 27.979,53.721
T4: J12.1 R22.1 | length 5.2
  Bottom Layer w0.508: J12.1@22.639,51.435 22.657,51.418 23.51,51.418 24,50.927 R22.1@27.598,50.927
T5: J13.1 R23.1 | length 1.6
  Bottom Layer w0.508: R23.1@19.177,49.872 J13.1@19.177,51.435
T6: J14.1 R24.1 | length 1.7
  Bottom Layer w0.508: J14.1@14.224,49.022 14.35,48.896 14.817,48.896 ; 14.818,48.895 R24.1@15.914,48.895
TOUCH_C\H\A\N\G\E\: IC1.43 IC3.14 R19.1 | length 14.8
  Top Layer w0.25: IC1.43@48.755,41.171 48.755,48.882 v1(49.403,49.53)
  Bottom Layer w0.25: IC3.14@44.934,51.874 46.16,51.874 46.726,51.308 R19.1@49.315,51.308
  Bottom Layer w0.254: R19.1@49.315,51.054 49.403,50.966 v1(49.403,49.53)
TOUCH_R\E\S\E\T\: IC3.13 R18.1 | length 2.5
  Bottom Layer w0.25: IC3.13@44.934,52.324 R18.1@46.902,52.324
  Bottom Layer w0.254: R18.1@46.902,52.324 R18.1@47.244,51.982
U0RXD: J15.1 MD1.34 P2.2 | length 21.5
  Top Layer w0.508: MD1.34@19.82,43.5 P2.2@19.82,47.117 ; v1(35.941,49.022) J15.1@36.888,49.022
  Bottom Layer w0.508: P2.2@19.812,47.117 33.991,47.117 35.85,48.976 35.87,48.976 35.915,49.021 v1@35.941,49.021
U0TXD: J16.1 MD1.35 P2.1 | length 24.9
  Top Layer w0.508: P2.1@17.272,47.117 18.542,45.847 MD1.35@18.542,43.577 ; v1(35.916,50.038) J16.1@36.888,50.038
  Bottom Layer w0.508: P2.1@17.272,47.117 17.768,47.613 18.709,47.613 19.344,48.248 34.126,48.248 v1(35.916,50.038)
pads on no net: IC1.12 IC1.24 IC1.27 IC1.28 IC1.29 IC1.33 IC1.36 IC1.37 IC1.38 IC2.2 IC2.3 IC2.4 IC2.5 IC2.22 IC2.26 IC2.36 IC2.37 IC2.44 IC2.45 IC3.6 IC3.7 IC3.10 IC3.16 IC3.18 IC3.19 IC3.20 IC3.EP LensHolder1.0 LensHolder1.1 MD1.4 MD1.5 MD1.6 MD1.7 MD1.8 MD1.9 MD1.11 MD1.12 MD1.19 MD1.20 MD1.21 MD1.22 MD1.27 MD1.28 MD1.29 MD1.30 MD1.32 MD1.33 MD1.37 U2.4 U3.19 U3.20 U3.21 U3.22 U3.23 U3.24 U3.25

## Polygon pours and split planes (outlines as drawn)
GND on Bottom Layer "GND_L02_P001" (solid, remove dead copper, pour order 1): 35,5 cw(c35,35) 5,35 cw(c35,35) 35,65 cw(c35,35) 65,35 cw(c35,35)

## Other copper
Multi-Layer:
  pour cut-out: 5,45 13.716,45 13.716,24.743 5,24.743

## Silkscreen, mask and mechanical layers (free items; w line width, h text height)
Top Overlay:
  text "PROG" at 25.981,49.73 h1
  text "TX RX" at 15.821,48.714 h1
  text "ESP_RST" at 23.314,21.068 h1
  text "GND" at 13.34,16.143 h0.5 r43
  text "DIN" at 15.118,14.238 h0.5 r43
  text "5V" at 17.404,12.206 h0.5 r43
  text "SDA" at 29.137,9.598 h1 r90
  text "SCL" at 31.652,9.598 h1 r90
  text "VIN" at 34.166,9.598 h1 r90
  text "GND" at 36.681,9.598 h1 r90
  text "TX" at 39.195,9.598 h1 r90
  text "RX" at 41.71,9.598 h1 r90
Bottom Overlay:
  lines w0.1: 25.273,59.944 25.527,59.69 26.924,59.69 ; 29.337,56.896 29.464,56.769 30.607,56.769
Mechanical 1:
  the board outline again, w0.001

## Text inside footprints (layer, text, board x,y; h text height)
BAT: Top Overlay "3V3" at 26.362,15.186 h1